# Altium PCB Upper_pcb_with_lcds_buttons_bme_CIRCULAR.pcbdoc
Units mm, origin at the board's own origin, x right, y up, seen from the top; angles counter-clockwise.
Board outline 60 x 60 mm, 2 copper layers (Top Layer, Bottom Layer), stack 1.671 mm thick; 7 components, 41 nets, 36 pads, 0 vias.
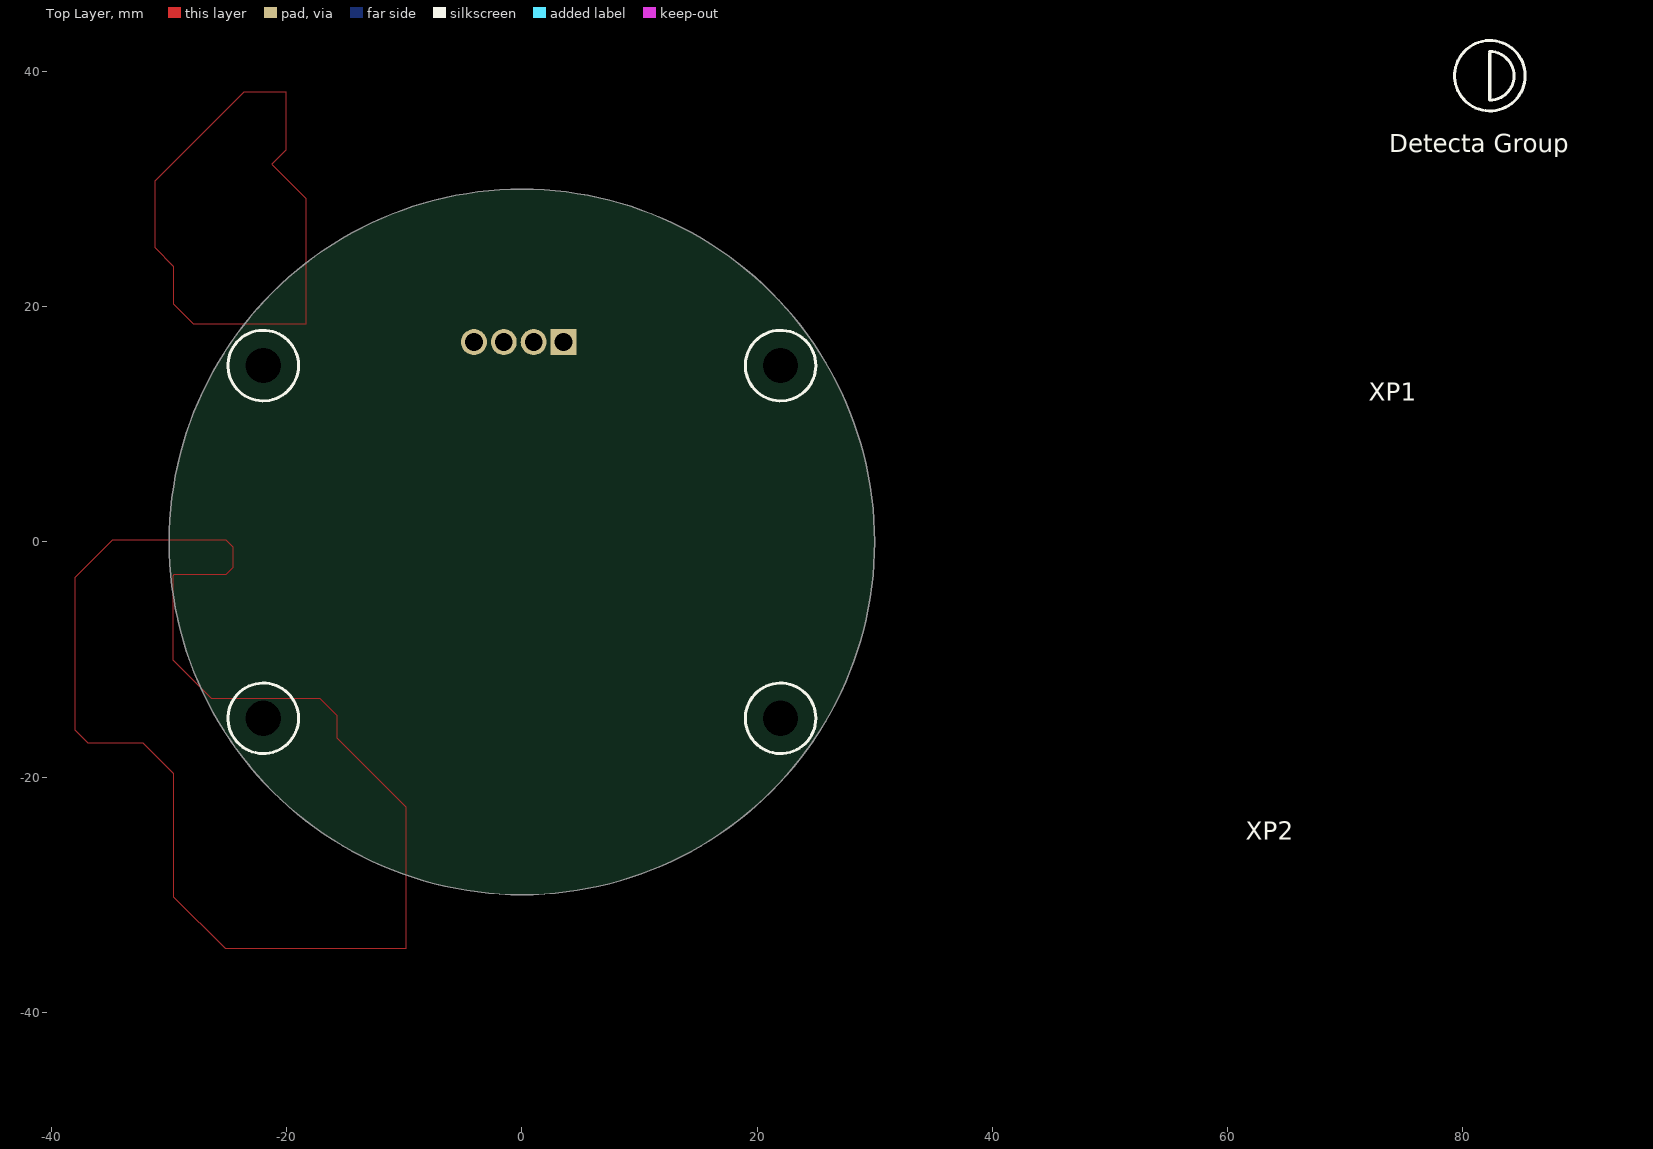
[diagram p0: Top Layer view]
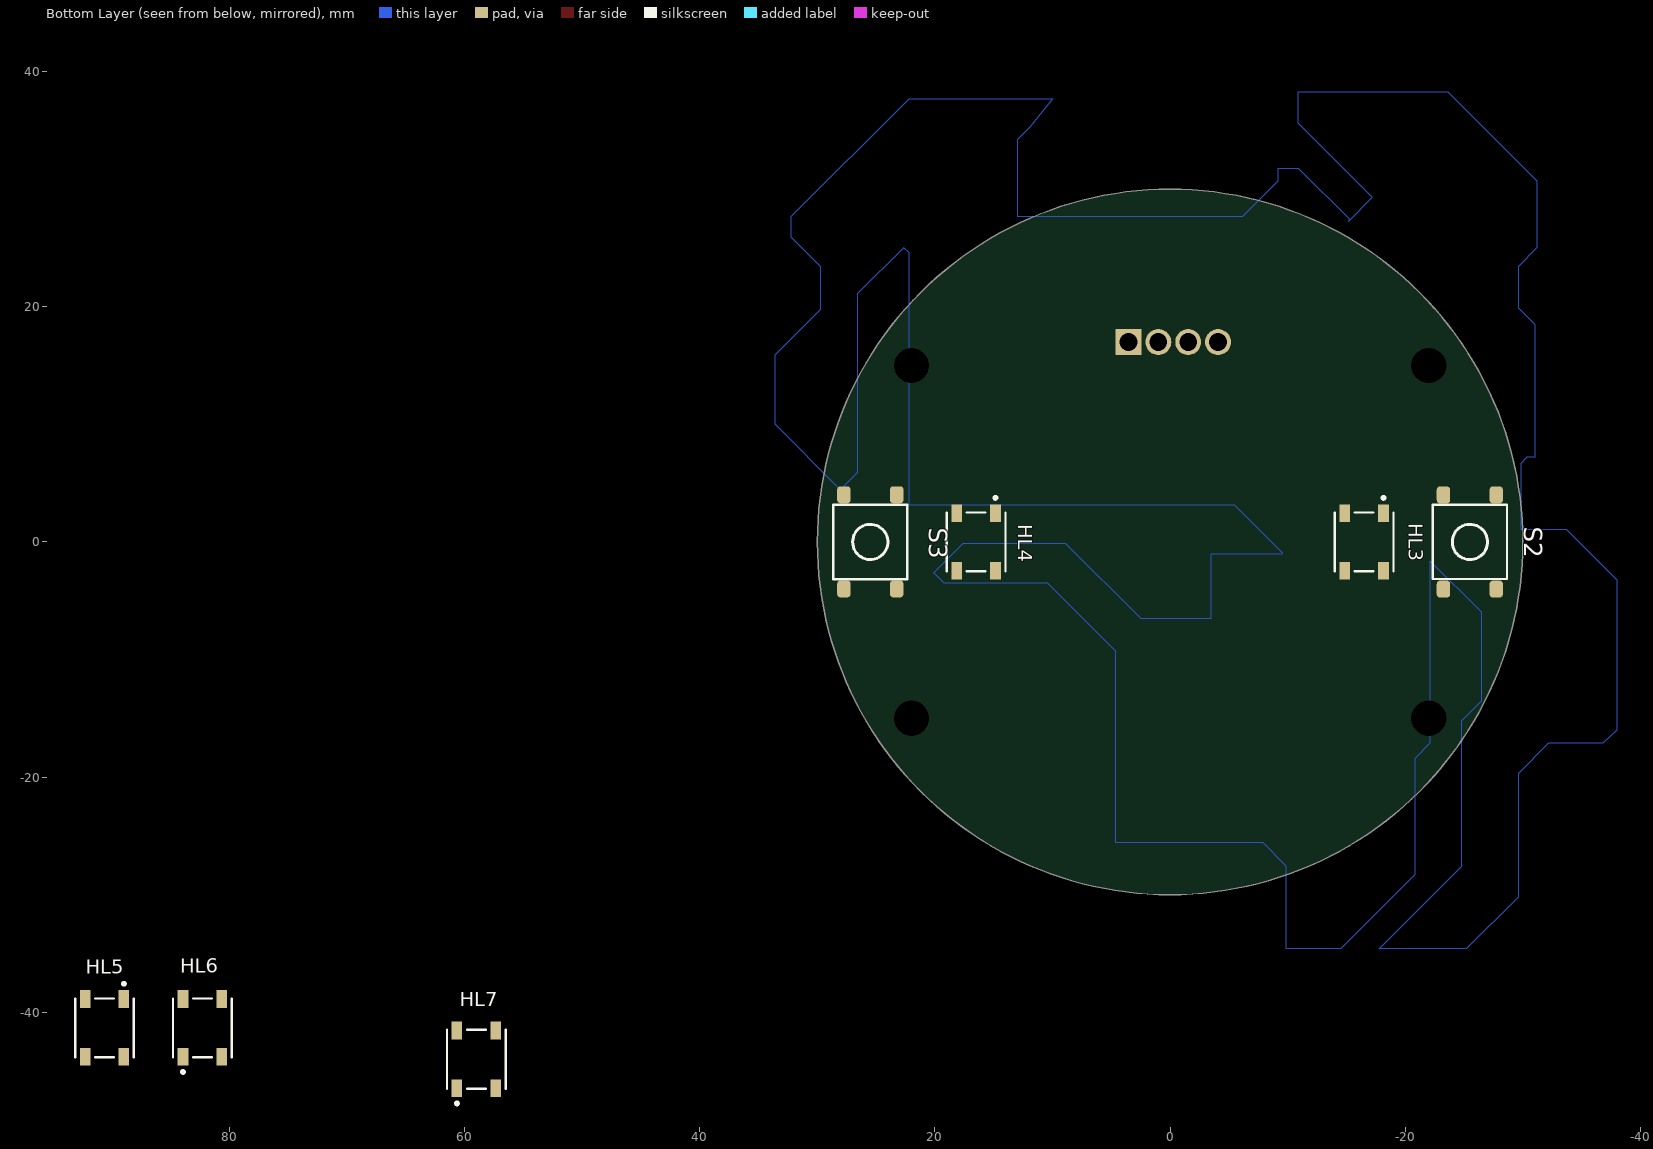
[diagram p1: Bottom Layer view, seen from below]

## Layer stack, top to bottom
Top Solder: solder mask 0.0102, Solder Resist, Dk 3.5
Top Layer: signal copper 0.0356
Dielectric 1: dielectric 1.6, FR-4, Dk 4.8
Bottom Layer: signal copper 0.0356
Bottom Solder: solder mask 0.0102, Solder Resist, Dk 3.5

## Board outline
-30,0 ccw(c0,0) 0,-30 ccw(c0,0) 30,0 ccw(c0,0) 0,30 ccw(c0,0)

## Design rules (kind name [scope] priority, off if disabled: settings)
Clearance Polygons [InNet('GND')] p1: gap=0.4 ignorepadtopadclearanceinfootprint=FALSE
Clearance [All] p2: gap=0.254 ignorepadtopadclearanceinfootprint=FALSE
PolygonConnect [All] p1: connectstyle=Relief reliefconductorwidth=0.254 reliefentries=4 polygonreliefangle="90 Angle" airgapwidth=0.254
RoutingVias [All] p1: holewidth=0.711 width=1.27 viastyle="Through Hole" minholewidth=0.711 minwidth=1.27 maxholewidth=0.711 maxwidth=1.27
SolderMaskExpansion [All] p1: expansion=0.102
Width [All] p1: maxlimit=5 minlimit=0.2 preferedwidth=0.254
30 further rules are at their usual default settings.

## Classes and differential pairs
component class dAir: HL3 HL7

## Components (designator, comment, footprint, x,y, rotation, side; value= is the part's Value field where it differs from the comment)
HL3 "WS2812B" ADAI-WS2812B_V -16.5,0 r270 bottom
HL4 "WS2812B" ADAI-WS2812B_V 16.5,0 r270 bottom
HL5 "WS2812B" ADAI-WS2812B_V 90.625,-41.325 r270 bottom
HL6 "WS2812B" ADAI-WS2812B_V 82.3,-41.325 r90 bottom
HL7 "WS2812B" ADAI-WS2812B_V 59,-44 r90 bottom
S2 "Comment" DIPT-DTSM-6_V -25.5,0 r270 bottom
S3 "Comment" DIPT-DTSM-6_V 25.5,0 r90 bottom

## Footprints (in the part's own frame and the unit in brackets; to place one, negate y for a bottom-side part, rotate by r counter-clockwise, add the part's x,y. Pads: shape width x height; smd on the part's side, far side on the other; paste and mask are expansions set on the pad)
ADAI-WS2812B_V [mm] "SMD, 4-Leads, Body 5x5mm, Pitch 3.3mm"
  rect 1.5x0.9 smd: 1(-2.45,1.65) 2(-2.45,-1.65) 3(2.45,-1.65) 4(2.45,1.65)
  silkscreen extent -3.87,-2.5 2.5,2.5, body extent -2.7,-2.5 2.7,2.5, height 1.69
DIPT-DTSM-6_V [mm] "Switch, Through-Hole, 4 Leads, Body 8.5x8.5mm, Row Spacing 9.0mm, Pitch 4.5mm"
  rrect50% 1.448x1.143 smd: 1(4.01,-2.25) 2(-4,-2.25) 3(4.01,2.24) 4(-4,2.24)
  silkscreen extent -3.16,-3.16 3.15,3.15, body extent -4.5,-3.1 4.5,3.1, height 4.5

## Part data
HL3 HL4 HL5 HL6 HL7: library part CMP-1740-00005-1, "Intelligent Control LED Integrated Light Source, 3.5 to 5.3 V, -25 to 80 degC, 4-Pin SMD, RoHS, Bulk", Case\Package=Radial, Current Rating="240 mA", Max Operating Temperature="125 degC", Min Operating Temperature="-55 degC", Package Quantity=200, Tolerance=10%, ComponentLink1Description="Manufacturer URL", ComponentLink1URL=https://www.adafruit.com/, ComponentLink2Description=Datasheet, ComponentLink2URL=https://cdn-shop.adafruit.com/datasheets/WS2812B.pdf, DatasheetVersion=May-13, Height="12.2 mm", Lead Pitch="5 mm", Length="12.2 mm", Mount="Through Hole", PackageDescription="4-Pin Surface Mount Device, Body 5 x 5 mm, Pitch 3.3 mm", PackageReference=WS2812B, Packaging=Bulk, Pins=2, Radiation Hardening=No, REACH SVHC="No SVHC", RoHSCompliant=true, Shielding=Unshielded

## Free pads (board coordinates)
  rect 2.2x2.2 hole 1.5: 1(3.54,17)
  round 2.2 hole 1.5: 2(1,17) 3(-1.54,17) 4(-4.08,17)
  round 0 hole 3: 9(-22,-15) 9(-22,15) 9(22,-15) 9(22,15)

## Nets (pads, with @x,y where several pads share a name; then routed paths per layer and width w, separated by ;. In a path a pad name is that pad's centre, name@x,y a point inside that pad or via, vN(x,y) a via of type N, cw(c..) or ccw(c..) an arc to the next point about the centre after c; other vN are vias at no path point)
3V: 
5V: 
+E: HL3.1 HL4.1 HL5.1 HL6.1 HL7.1
GND: HL3.3 HL4.3 HL5.3 HL6.3 HL7.3
NetBAT1_1: 
NetC6_2: 
NetC13_1: 
NetC15_2: 
NetC17_1: 
NetC17_2: 
NetC18_1: 
NetC21_1: 
NetDA1_1: 
NetDA1_7: 
NetDA1_9: 
NetDA1_12: 
NetDA1_16: 
NetDA4_1: 
NetDD1_7: 
NetDD1_9: 
NetDD1_12: S2.1 S2.2
NetDD1_25: 
NetDD1_26: 
NetDD1_27: 
NetDD1_33: 
NetDD1_34: pad.1
NetDD1_35: pad.2
NetDD1_36: 
NetHL1_1: 
NetHL2_1: 
NetHL3_2: HL3.2 HL7.4
NetHL3_4: HL3.4
NetLS1_2: 
NetR13_1: 
NetR13_2: pad.4
NetR14_1: 
NetR14_2: pad.3
NetR15_2: 
NetR16_2: 
NetR22_2: 
"V ESP": 
pads on no net: HL4.2 HL4.4 HL5.2 HL5.4 HL6.2 HL6.4 HL7.2 S2.3 S2.4 S3.1 S3.2 S3.3 S3.4

## Polygon pours and split planes (outlines as drawn)
GND on Top Layer "GND_L01_P002" (solid, remove dead copper, shelved, pour order 2): -23.6,38.3 -20.1,38.3 -20.1,33.3 -21.287,32.113 -18.4,29.225 -18.4,18.5 -27.9,18.5 -29.6,20.2 -29.6,23.4 -31.2,25 -31.2,30.7
GND on Top Layer "NONET_L01_P004" (solid, remove dead copper, shelved, pour order 4): -15.745,-14.755 -15.745,-16.655 -9.9,-22.5 -9.9,-34.6 -25.2,-34.6 -29.6,-30.2 -29.6,-22.7 -29.6,-19.7 -32.2,-17.1 -36.9,-17.1 -38,-16 -38,-3 -34.8,0.2 -25.2,0.2 -24.6,-0.4 -24.6,-2.2 -25.2,-2.8 -29.6,-2.8 -29.7,-2.9 -29.7,-10 -26.4,-13.3 -17.2,-13.3
GND on Bottom Layer "GND_L02_P000" (solid, remove dead copper, shelved, pour order 0): -25.2,-34.6 -17.8,-34.6 -24.8,-27.6 -24.8,-15.2 -26.5,-13.5 -26.5,-6 -22.147,-1.647 -22.1,-1.694 -22.1,-17.123 -20.8,-18.423 -20.8,-28.3 -14.5,-34.6 -9.9,-34.6 -9.9,-27.588 -7.912,-25.6 4.6,-25.6 4.6,-19.7 4.6,-9.3 10.4,-3.5 19.2,-3.5 20.1,-2.6 17.594,-0.094 8.908,-0.094 2.502,-6.5 -3.5,-6.5 -3.5,-1.008 -9.534,-1.008 -9.565,-0.977 -5.488,3.1 22.2,3.1 22.2,24.577 22.662,25.038 26.6,21.1 26.6,5.865 28.033,4.433 33.6,10 33.6,15.9 29.7,19.8 29.7,23.4 32.2,25.9 32.2,27.7 22.2,37.7 10,37.7 11.95,35.25 13,34.2 13,27.7 -6.2,27.7 -9.2,30.7 -9.2,31.8 -10.9,31.8 -15.179,27.521 -15.179,27.279 -17.2,29.3 -10.9,35.6 -10.9,38.3 -23.6,38.3 -31.2,30.7 -31.2,25 -29.6,23.4 -29.6,19.9 -31,18.5 -31,7.206 -30.347,7.206 -29.807,6.666 -29.807,1.1 -31,1.1 -33.7,1.1 -38,-3.2 -38,-16 -36.8,-17.123 -32.177,-17.123 -29.6,-19.7 -29.6,-30.2

## Silkscreen, mask and mechanical layers (free items; w line width, h text height)
Top Overlay:
  circle w0.254: c82.325,39.65 r3
  circle w0.254: c-22,-15 r3
  circle w0.254: c22,-15 r3
  circle w0.254: c22,15 r3
  circle w0.254: c-22,15 r3
  lines w0.254: 82.3,37.566 ccw(c82.3,39.638) 82.3,41.709
  lines w0.3: 82.3,37.7 82.3,41.575
  text "Detecta Group" at 73.775,33.125 h1.52
  text "XP1" at 72,12 h1.52
  text "XP2" at 61.55,-25.325 h1.52
  text "dAir_board v 1.1.1" at 129,-29 h1.52
Bottom Overlay:
  text "JLCJLCJLCJLC" at 115,-17 h1.52
Mechanical 1:
  circle w1: c0,0 r30